# Altium PCB AIRZAI_LED_SENSE_FLEX_REVC.PcbDoc
Units mm, origin at the board's own origin, x right, y up, seen from the top; angles counter-clockwise.
Board outline 69.05 x 111.73 mm, 2 copper layers (Top Layer, Bottom Layer); 28 components, 19 nets, 88 pads, 45 vias.
Unrouted connection lines stored in the file: 72.
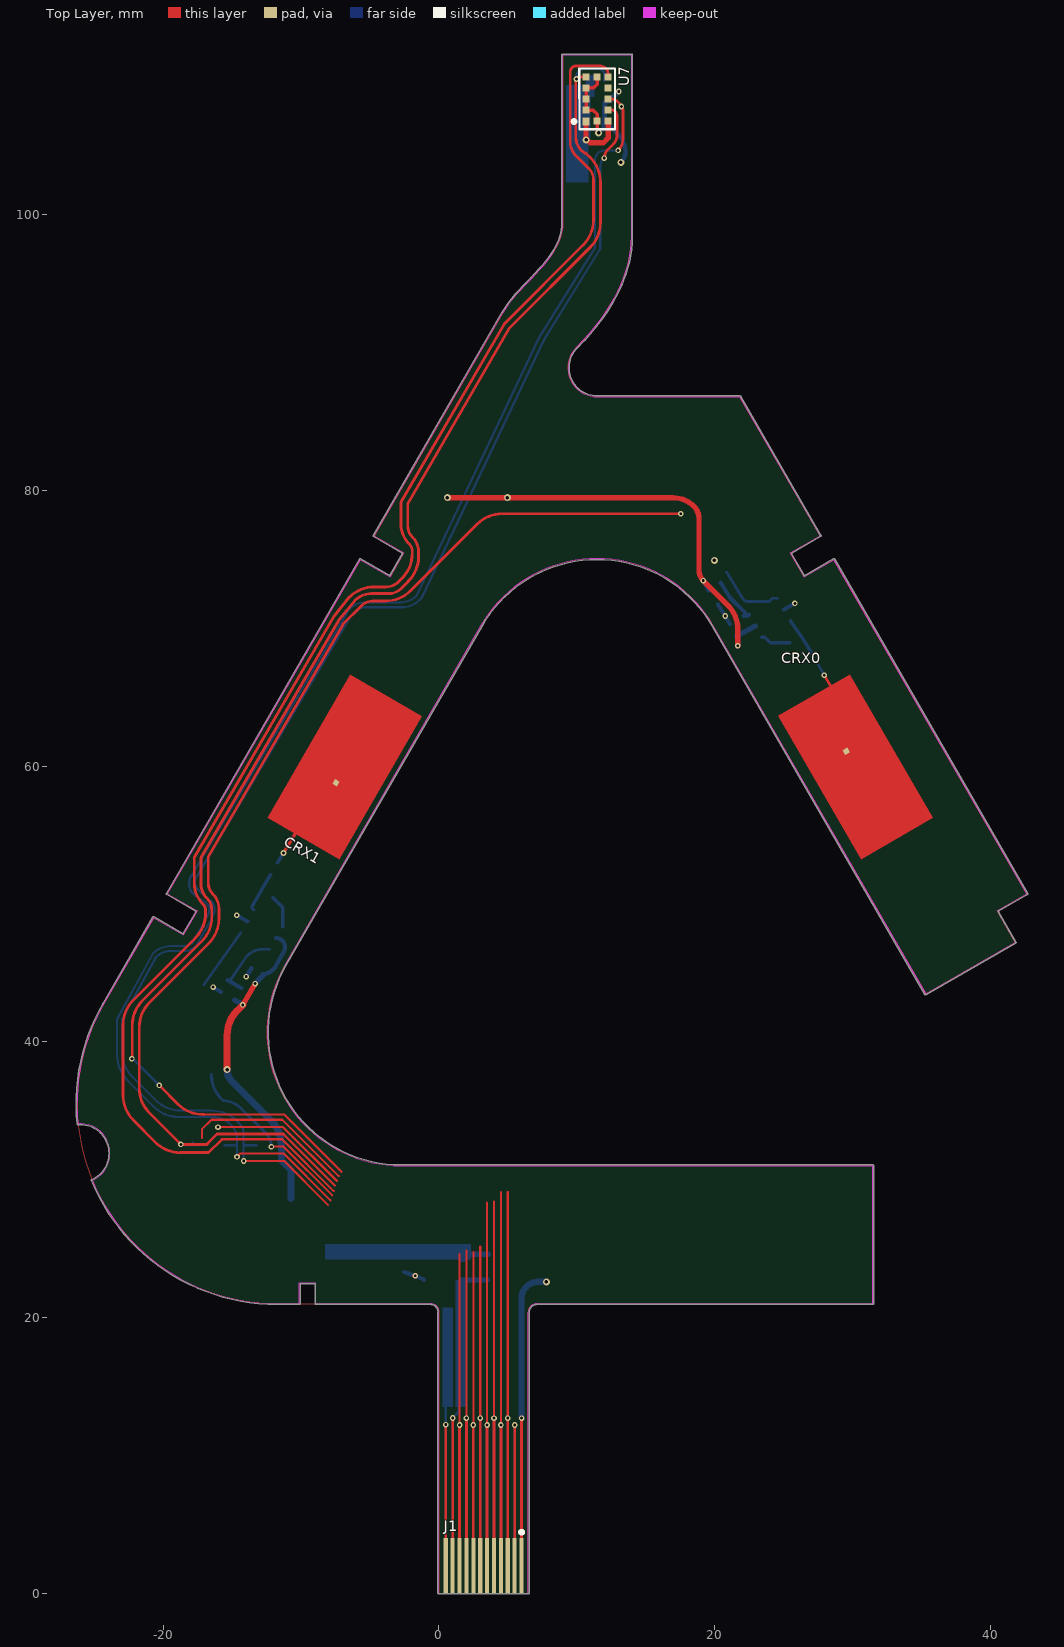
[diagram p0: Top Layer view]
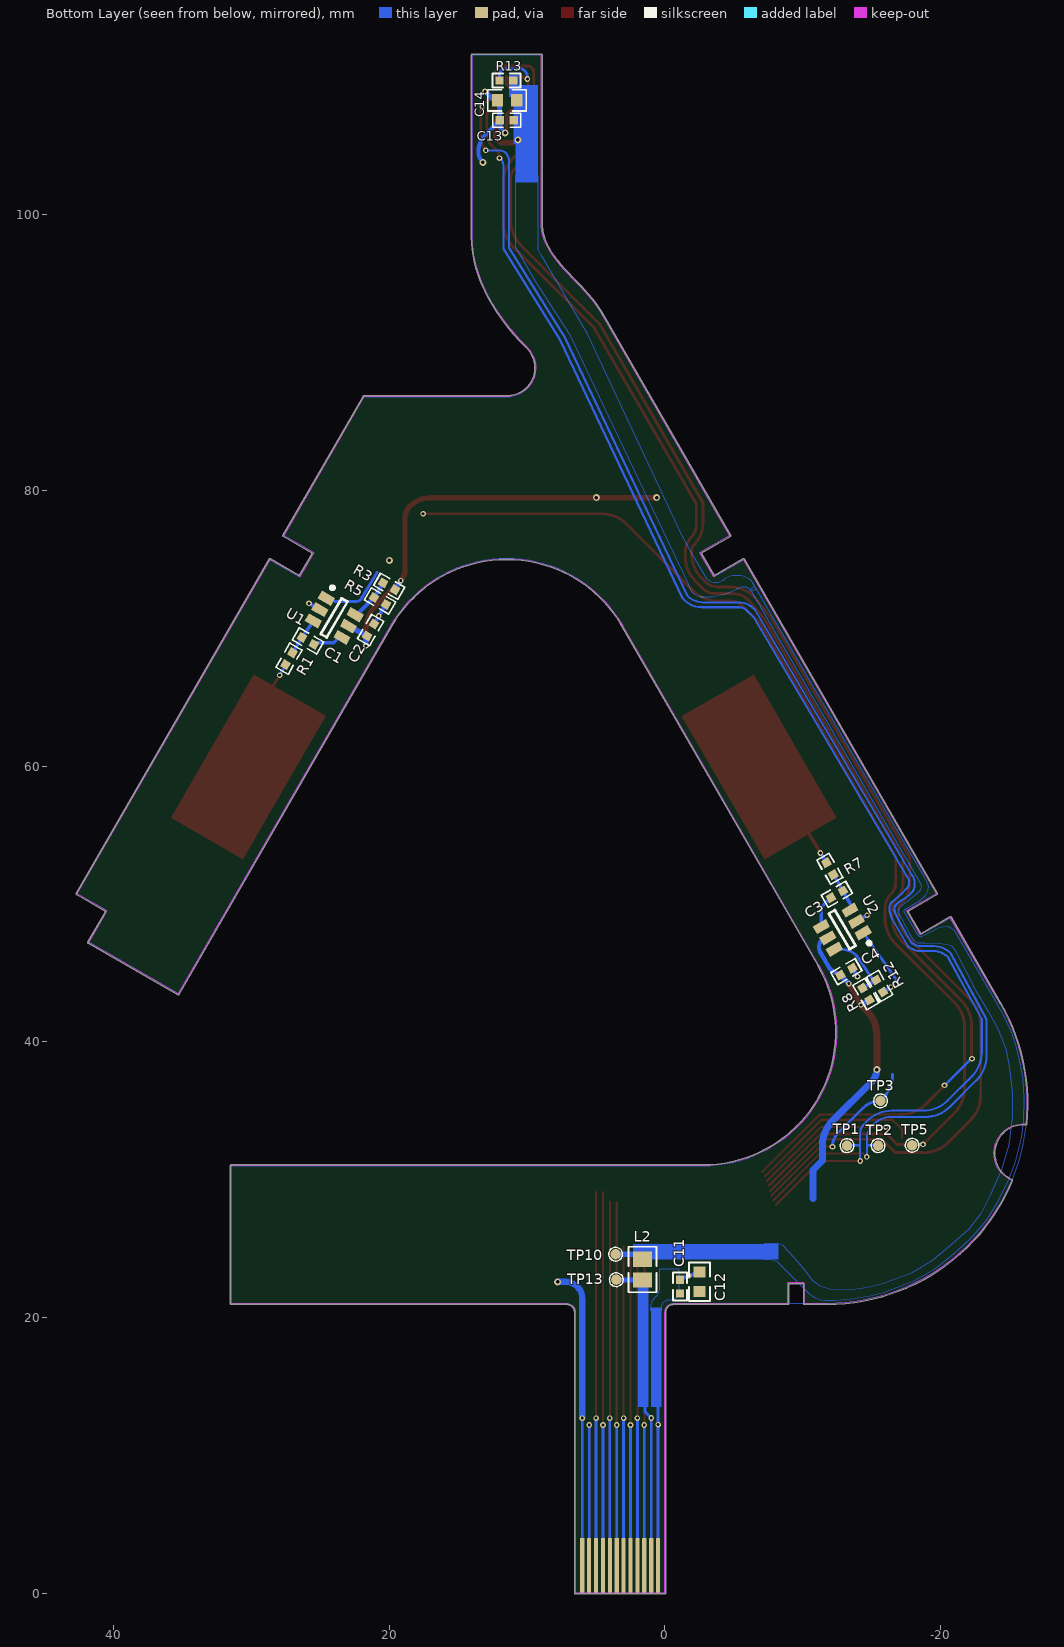
[diagram p1: Bottom Layer view, seen from below]
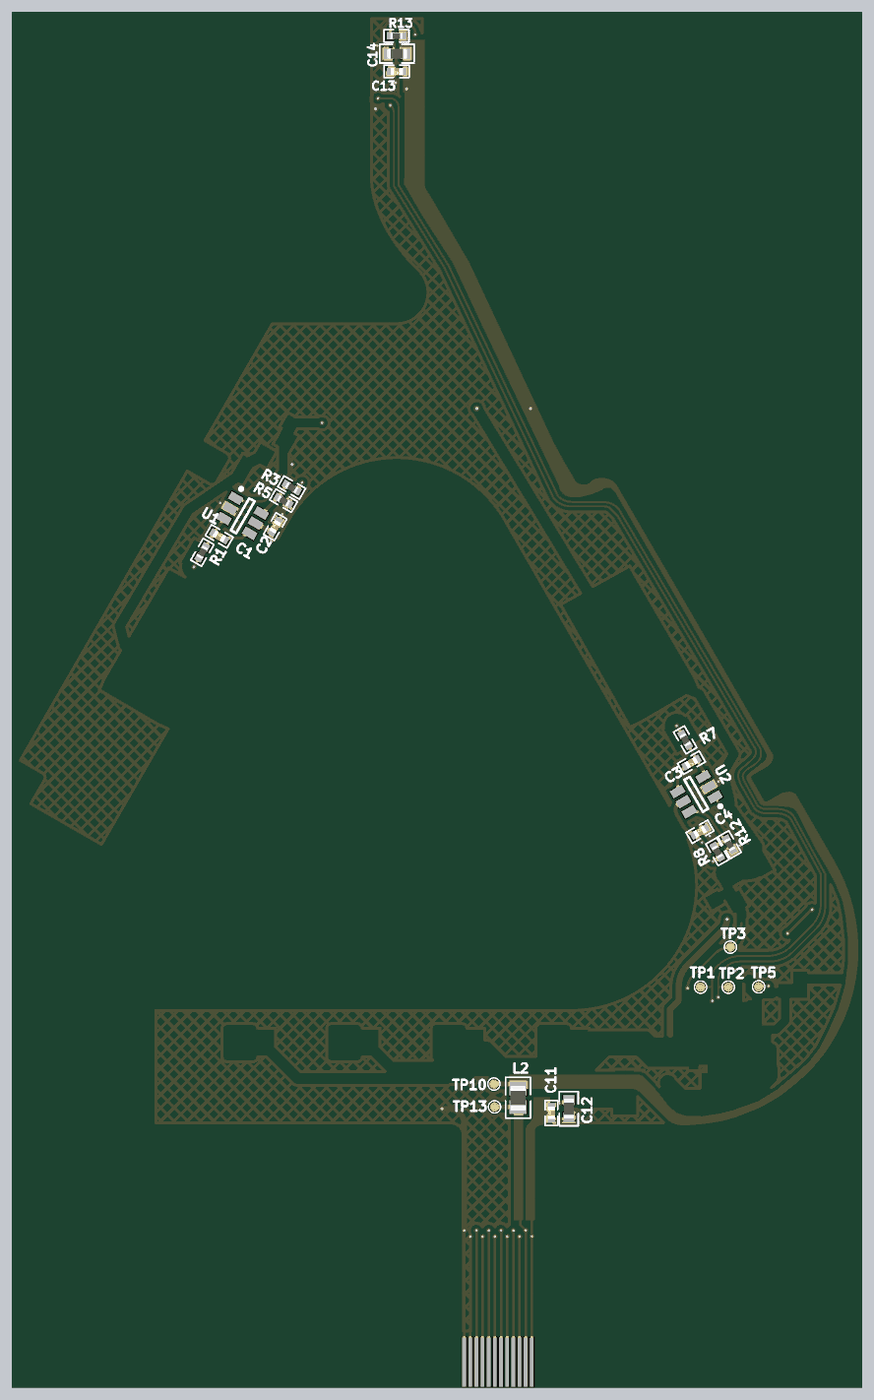
[diagram p2: 3D render of the assembled board from below, using the file's embedded part models]

## Layer stack, top to bottom
Top Solder: solder mask 0.0102, Solder Resist, Dk 3.5
Top Layer: signal copper 0.0356
Dielectric 1: dielectric 0.32, FR-4, Dk 4.8
Bottom Layer: signal copper 0.0356
Bottom Solder: solder mask 0.0102, Solder Resist, Dk 3.5

## Board outline
-25.209,29.911 cw(c-25.15,29.935) -25.175,29.994 ccw(c-26.021,31.901) -23.935,31.901 ccw(c-26.021,31.901) -26.182,33.981 cw(c-26.187,34.045) -26.251,34.038 cw(c-11.76,35.501) -24.373,42.783 cw(c-24.318,42.751) -24.373,42.783 -20.761,49.039 cw(c-20.705,49.007) -20.673,49.063 -18.564,47.845 -17.627,49.466 -19.737,50.684 cw(c-19.705,50.739) -19.761,50.771 -5.76,75.019 cw(c-5.705,74.987) -5.673,75.042 -3.563,73.824 -2.627,75.446 -4.737,76.664 cw(c-4.705,76.719) -4.76,76.751 4.583,92.932 cw(c4.638,92.9) 4.583,92.933 cw(c11.813,88.612) 5.542,94.235 cw(c21.327,80.392) 6.104,94.851 cw(c6.151,94.807) 6.104,94.851 6.683,95.457 cw(c6.729,95.413) 6.684,95.457 ccw(c-15.944,117.23) 7.251,96.063 cw(c7.298,96.019) 7.251,96.063 ccw(c-2.378,104.856) 7.777,96.676 cw(c7.827,96.637) 7.778,96.677 ccw(c1.874,101.437) 8.235,97.308 ccw(c1.874,101.437) 8.236,97.308 cw(c8.289,97.274) 8.236,97.309 ccw(c4.017,100.048) 8.596,97.967 ccw(c5.182,99.516) 8.596,97.967 ccw(c5.182,99.516) 8.832,98.66 ccw(c5.182,99.516) 8.832,98.661 8.832,98.66 ccw(c5.64,99.401) 8.917,99.4 8.917,100.4 cw(c8.981,100.4) 8.918,100.409 8.918,111.6 cw(c8.982,111.6) 8.986,111.664 13.982,111.664 cw(c13.982,111.6) 14.046,111.6 cw(c13.982,111.6) 14.045,111.591 14.045,100.4 ccw(c13.981,100.4) 14.045,100.4 14.045,98.4 cw(c13.981,98.4) 14.045,98.4 cw(c6.078,98.43) 13.834,96.61 13.834,96.611 cw(c4.66,98.734) 13.586,95.733 cw(c3.527,99.114) 13.254,94.873 cw(c2.33,99.635) 12.85,94.035 cw(c12.793,94.065) 12.85,94.035 cw(c0.617,100.57) 11.858,92.447 cw(c-1.264,101.928) 10.056,90.355 cw(c10.011,90.4) 10.055,90.354 cw(c11.481,88.9) 10.056,90.355 10.055,90.354 ccw(c11.481,88.9) 11.481,86.864 21.846,86.864 cw(c21.846,86.8) 21.901,86.832 27.721,76.75 cw(c27.666,76.718) 27.73,76.718 cw(c27.666,76.718) 27.698,76.663 cw(c27.666,76.718) 27.698,76.663 25.588,75.445 26.524,73.824 28.634,75.041 cw(c28.666,74.986) 28.634,75.042 28.634,75.041 28.634,75.042 cw(c28.666,74.986) 28.721,75.018 cw(c28.666,74.986) 28.721,75.018 42.72,50.77 cw(c42.665,50.738) 42.72,50.77 cw(c42.665,50.738) 42.729,50.738 cw(c42.665,50.738) 42.697,50.683 cw(c42.665,50.738) 42.697,50.683 40.587,49.465 41.87,47.241 cw(c41.815,47.209) 41.871,47.241 41.87,47.241 41.871,47.241 cw(c41.815,47.209) 41.879,47.209 cw(c41.815,47.209) 41.847,47.154 cw(c41.815,47.209) 41.847,47.154 35.347,43.413 cw(c35.315,43.468) 35.347,43.412 35.347,43.413 cw(c35.315,43.468) 35.26,43.436 cw(c35.315,43.468) 35.26,43.436 19.825,70.17 cw(c19.881,70.202) 19.825,70.171 cw(c19.881,70.202) 19.825,70.171 cw(c11.48,65.353) 19.825,70.171 19.825,70.17 19.825,70.171 ccw(c11.48,65.353) 3.135,70.171 ccw(c11.48,65.353) 3.135,70.171 ccw(c3.08,70.203) 3.135,70.171 -11.099,45.519 cw(c-11.154,45.551) -11.099,45.518 ccw(c-2.754,40.701) -2.754,31.064 31.479,31.064 cw(c31.479,31) 31.543,31 cw(c31.479,31) 31.543,31 31.543,21 ccw(c31.479,21) 31.543,21 cw(c31.479,21) 31.479,20.936 7.11,20.936 cw(c7.103,21) 7.104,20.936 ccw(c7.106,20.394) 6.564,20.391 cw(c6.5,20.39) 6.564,20.39 6.564,0 cw(c6.5,0) 6.5,-0.064 0,-0.064 cw(c0,0) -0.064,0 -0.064,20.381 cw(c0,20.381) -0.064,20.382 ccw(c-0.606,20.394) -0.064,20.394 ccw(c-0.606,20.394) -0.595,20.936 ccw(c-0.606,20.394) -0.595,20.936 -0.594,20.936 -8.92,20.936 cw(c-8.92,21) -8.966,20.955 cw(c-8.921,21.001) -8.985,21.001 -8.985,22.437 -10.057,22.437 -10.057,21.001 ccw(c-10.121,21.001) -10.057,21.001 cw(c-10.121,21.001) -10.121,20.937 -11.761,20.937 cw(c-11.76,35.501)

## Design rules (kind name [scope] priority, off if disabled: settings)
Clearance Clearance_Board_Cutout_Electrodes [(InComponent('CRX0') OR InComponent('CRX1')) vs OnLayer('Multi-Layer')] p1: gap=0 ignorepadtopadclearanceinfootprint=FALSE
Clearance Clearance_Board_Cutout_Diodes [(InComponent('D1') OR InComponent('D2') OR InComponent('D3') OR InComponent('D4') OR InComponent('D5') OR InComponent('D6')) vs OnLayer('Multi-Layer')] p2: gap=0 ignorepadtopadclearanceinfootprint=FALSE
Clearance Clearance_Keepout [(OnLayer('Keep-Out Layer')) vs (InComponent('D1') OR InComponent('D2') OR InComponent('D3') OR InComponent('D4') OR InComponent('D5') OR InComponent('D6') OR InComponent('CRX0') OR InComponent('CRX1') OR InComponent('J1'))] p3: gap=0 ignorepadtopadclearanceinfootprint=FALSE
Clearance Clearance_GND_POLY_ELECTRODE [(InComponent('CRX0') OR InComponent('CRX1') OR InComponent('CRX2') OR InNet('NetCRX0_1') OR InNet('NetCRX1_1') OR InNet('NetCRX2_1') OR InNet('NetR4_2') OR InNet('NetR2_1') OR InNet('NetR1_1')) vs (InNet('GND') AND InPolygon)] p4: gap=0.762 ignorepadtopadclearanceinfootprint=FALSE
Clearance Clearance_POLYGON_KEEPOUT [(OnLayer('Keep-Out Layer')) vs (InNet('GND') AND InPolygon)] p5: gap=0.254 ignorepadtopadclearanceinfootprint=FALSE
Clearance Clearance_GND_POLY_REST [All vs (InNet('GND') AND InPolygon)] p6: gap=0.254 ignorepadtopadclearanceinfootprint=FALSE
Clearance [All] p7: gap=0.152 ignorepadtopadclearanceinfootprint=FALSE
MinimumSolderMaskSliver [All] p1: minsoldermaskwidth=0.025
PolygonConnect [All] p1: connectstyle=Direct reliefconductorwidth=0.254 reliefentries=4 polygonreliefangle="90 Angle" airgapwidth=0.254
RoomDefinition AIRZAI_LED_SENSE_FLEX_REVC [InComponentClass('AIRZAI_LED_SENSE_FLEX_REVC')] p1: confinementstyle=ConfineIn formatcopy=TRUE lockcomponents=FALSE outline -98.86,-68.935 273.504,-68.935 273.504,174.905 -98.86,174.905
RoutingVias [All] p1: holewidth=0.711 width=1.27 viastyle="Through Hole" minholewidth=0.203 minwidth=0.406 maxholewidth=0.711 maxwidth=1.27
SilkToSilkClearance [All] p1: silktosilkclearance=0.025
SilkToSolderMaskClearance [IsPad] p1: minsilkscreentomaskgap=0.051 clearancetoexposedcopper=TRUE
SolderMaskExpansion [All] p1: expansion=0.102
UnRoutedNet [All] p1: checkbadconnections=TRUE
Width [All] p1: maxlimit=2.54 minlimit=0.152 preferedwidth=0.254
26 further rules are at their usual default settings.

## Components (designator, comment, footprint, x,y, rotation, side; value= is the part's Value field where it differs from the comment)
C1 "22nF" 0402CAP 25.908,69.088 r210 bottom
C2 "0.1µF" 0402CAP 21.361,69.875 r120 bottom
C3 "22nF" 0402CAP -12.471,50.698 r330 bottom
C4 "0.1µF" 0402CAP -13.161,45.087 r150 bottom
C11 "0.1µF" 0402CAP -1.086,22.238 r90 bottom
C12 "10µF" 0603 -2.508,22.588 r90 bottom
C13 "0.1µF" 0402CAP 11.481,106.864 r0 bottom
C14 "4.7µF" 0603 11.455,108.306 r180 bottom
CRX0 "CONTACT POINT 1" "CONTACT_POINT_1CM _SQ" 30.23,59.95 r300 top
CRX1 "CONTACT POINT 1" "CONTACT_POINT_1CM _SQ" -6.828,59.938 r60 top
J1 "FFC Pads" FFC_PADS 3.25,2 r0 top locked
L2 "CB2012T100KR" 0805 1.626,23.47 r90 bottom value=10uH
R1 "10k 0402(1005)" 0402 27.28,67.793 r300 bottom value=10k
R3 "Jumper 0402(1005)" 0402 20.018,73.05 r210 bottom value=0R
R5 "DNP 0402(1005)" 0402 20.676,71.984 r210 bottom value=DNP
R7 "10k 0402(1005)" 0402 -11.963,52.553 r60 bottom value=10k
R8 "Jumper 0402(1005)" 0402 -14.58,43.459 r240 bottom value=0R
R12 "DNP 0402(1005)" 0402 -15.57,44.044 r240 bottom value=DNP
R13 "10k 0402(1005)" 0402 11.506,109.753 r0 bottom value=10k
TP1 "Test Point" TP_0.9MM -13.21,32.461 r90 bottom
TP2 "Test Point" TP_0.9MM -15.467,32.461 r90 bottom
TP3 "Test Point" TP_0.9MM -15.638,35.712 r90 bottom
TP5 "Test Point" TP_0.9MM -17.932,32.487 r90 bottom
TP10 "Test Point" TP_0.9MM 3.581,24.587 r90 bottom
TP13 "Test Point" TP_0.9MM 3.531,22.733 r90 bottom
U1 "AT42QT1010-TSHR" SOT-23-6-AT42QT1010-TSHR 24.002,70.762 r210 bottom
U2 "AT42QT1010-TSHR" SOT-23-6-AT42QT1010-TSHR -12.86,48.133 r330 bottom
U7 "VL53L0CXV0DH/1" VL53L0X 11.481,108.407 r270 top

## Footprints (in the part's own frame and the unit in brackets; to place one, negate y for a bottom-side part, rotate by r counter-clockwise, add the part's x,y. Pads: shape width x height; smd on the part's side, far side on the other; paste and mask are expansions set on the pad)
0402 [mm] "Chip Resistor, Body 1.1x0.5mm, IPC High Density"
  rect 0.6x0.6 smd: 1(-0.5,0) 2(0.5,0)
  silkscreen extent -1.02,-0.51 1.02,0.51, body extent -0.5,-0.25 0.5,0.25, height 0.27
0402CAP [mm] "Chip Capacitor, Body 1.1x0.5mm, IPC High Density"
  rect 0.6x0.6 smd: 1(-0.5,0) 2(0.5,0)
  silkscreen extent -1.02,-0.51 1.02,0.51, body extent -0.5,-0.3 0.5,0.3, height 0.19
0603 [mm] "Chip Resistor, Body 1.6x0.8mm, IPC High Density"
  rect 0.8x0.9 smd: 1(-0.7,0) 2(0.7,0)
  silkscreen extent -1.4,-0.76 1.4,0.76, body extent -0.8,-0.41 0.8,0.4, height 0.37
0805 [mm] "Chip Resistor, Body 2.0x1.3mm, IPC High Density"
  rect 1.1x1.4 smd: 1(-0.75,0) 2(0.75,0)
  silkscreen extent -1.65,-1.02 1.65,1.02, body extent -1.02,-0.64 0.98,0.62, height 0.47
"CONTACT_POINT_1CM _SQ" [mm]
  rect 0.4x0.4 smd paste-2 mask-2: 1(-1.312,-0.018)
  Top Layer region: 6,-3 6,3 -6,3 -6,-3
FFC_PADS [mm] "(0.50mm"
  rect 0.3x4 smd: 1(2.75,0) 2(2.25,0) 3(1.75,0) 4(1.25,0) 5(0.75,0) 6(0.25,0) 7(-0.25,0) 8(-0.75,0) 9(-1.25,0) 10(-1.75,0) 11(-2.25,0) 12(-2.75,0)
  rect 0.3x4 smd far side: 1(2.75,0) 2(2.25,0) 3(1.75,0) 4(1.25,0) 5(0.75,0) 6(0.25,0) 7(-0.25,0) 8(-0.75,0) 9(-1.25,0) 10(-1.75,0) 11(-2.25,0) 12(-2.75,0)
  silkscreen extent 2.63,2.29 2.87,2.54
SOT-23-6-AT42QT1010-TSHR [mm] "SOT23, 6-Leads, Body 2.9x1.6mm, Pitch 0.95mm, Lead Span 2.8mm, IPC Medium Density"
  rect 1.1x0.65 smd: 1(-1.2,0.95) 2(-1.2,0) 3(-1.2,-0.95) 4(1.2,-0.95) 5(1.2,0) 6(1.2,0.95)
  silkscreen extent -1.32,-1.5 0.25,1.95, body extent -0.88,-1.5 0.88,1.5, height 1.45
TP_0.9MM [mm] "0.9MM DIA TESTPOINT"
  round 0.75 smd paste-5 mask+0.05: 1(0,0)
  silkscreen extent -0.5,-0.5 0.5,0.5
VL53L0X [mm]
  rect 0.58x0.5 smd: 1(1.64,-0.8)
  rect 0.5x0.5 smd: 2(0.8,-0.8) 3(0,-0.8) 4(-0.8,-0.8) 5(-1.6,-0.8) 6(-1.6,0) 7(-1.6,0.8) 8(-0.8,0.8) 9(0,0.8) 10(0.8,0.8) 11(1.6,0.8) 12(1.6,0)
  silkscreen extent -2.2,-1.79 2.2,1.3, body extent -2.2,-1.3 2.2,1.3, height 3.72

## Part data
C1 C3: library part C0402-100n, "Capacitor, X7R, ±10%", Case/Package=0402, Case Code (Metric)=1005, Dielectric=X7R, Manufacturer=TDK, Manufacturer Part Number=CGA2B2X7R1E223K050BA, Max Operating Temperature=125°C, Min Operating Temperature=-55°C, Package Quantity=1, Ratings=AEC-Q200, Supplier Part Number 1=445-5609-1-ND, Tolerance=10%, Voltage Rating=25V, Capacitance=22nF, Case Code (Imperial)=0402, ComponentLink1Description=http://www.mouser.com/ds/2/281/c02e-2905.pdf?src-supplier=Mouser, ComponentLink1URL=http://www.mouser.com/ds/2/281/c02e-2905.pdf?src-supplier=Mouser, ComponentLink2Description=http://psearch.en.murata.com/capacitor/product/GRM155R71H333KE14%23.pdf?src-supplier=Avnet, ComponentLink2URL=http://psearch.en.murata.com/capacitor/product/GRM155R71H333KE14%23.pdf?src-supplier=Avnet, ComponentLink3Description=http://search.murata.co.jp/Ceramy/image/img/A01X/G101/ENG/GRM155R71H333KE14-01.pdf?src-supplier=Digi-Key, ComponentLink3URL=http://search.murata.co.jp/Ceramy/image/img/A01X/G101/ENG/GRM155R71H333KE14-01.pdf?src-supplier=Digi-Key, ComponentLink4Description=https://datasheet.ciiva.com/24220/cga2b2x7r1e223k050ba-265693-24220032.pdf?src-supplier=Mouser, ComponentLink4URL=https://datasheet.ciiva.com/24220/cga2b2x7r1e223k050ba-265693-24220032.pdf?src-supplier=Mouser, ComponentLink5Description=https://datasheet.ciiva.com/7975/1807242-7975269.pdf?src-supplier=Element14, ComponentLink5URL=https://datasheet.ciiva.com/7975/1807242-7975269.pdf?src-supplier=Element14, Composition=Ceramic, Depth=0.5mm, Height=0.5mm, Length=1mm, Mount="Surface Mount", Packaging="Tape and Reel", Pricing 1="1 = 0.10000, 10 = 0.06500, 100 = 0.02910, 500 = 0.02080, 1000 = 0.01635, 2500 = 0.01486, 5000 = 0.01367 (USD)", REACH SVHC="No SVHC", RoHS=Yes, Stock 1=499669, Supplier 1=Digi-Key, Termination=SMD/SMT, Thickness=0.022inch, Voltage Rating (DC)=25V, Weight=2.3E-05oz, Width=0.5mm
C2 C4 C11 C13: library part C0402-100n, "Capacitor, X7R, ±10%", Case-EIA=0402, Case-Metric=1005, Manufacturer=TDK, Manufacturer Part Number=C1005X7R1C104K, Rated Voltage="16 V", Supplier Part Number 1=445-4952-2-ND, Tolerance=±20%, Max Thickness="0.6 mm", Note="16V ±10% X7R", Pin Count=2, Supplier 1=Digi-Key, Technology=SMT
C12: library part C0402-100n, "Capacitor, X7R, ±10%", Case-EIA=0603, Case-Metric=1608, Manufacturer=MURATA, Manufacturer Part Number=GRM188R60J106ME47D, Rated Voltage="6.3 V", Supplier Part Number 1=490-3896-6-ND, Tolerance=±20%, Max Thickness="0.9 mm", Note="6.3volts X5R 20%", Pin Count=2, Supplier 1=Digi-Key, Technology=SMT
C14: library part "C0603-1µ0 X7R", "Capacitor, X7R, ±10%", Case-EIA=0402, Case-Metric=1005, Manufacturer=TDK, Manufacturer Part Number=C1005X5R0J475M, Rated Voltage="6.3 V", Supplier Part Number 1=445-7395-2-ND, Tolerance=±20%, Max Thickness="0.6 mm", Note="6.3volts X5R 20%", Supplier 1=Digi-Key, Technology=SMT
CRX0 CRX1: library part WIRE_POINT
J1: library part FFC_PADS, "0.5 mm Pitch FFC Pads", ComponentLink1URL=http://www.molex.com/molex/index.jsp, ComponentLink2Description=Datasheet, ComponentLink2URL=http://www.molex.com/webdocs/datasheets/pdf/en-us/0528921233_FFC_FPC_CONNECTORS.pdf, ComponentLink3Description="Package Specification", ComponentLink3URL=http://www.molex.com/pdm_docs/sd/528921233_sd.pdf, Note=DNP
L2: "Inductor, 10 µH, 0.5A, 0.65 ohm, SMD", Case/Package=0805, Case Code (Metric)=2012, Current Rating=520mA, DC Resistance (DCR)=500mR, Inductance=10uH, Inductance Tolerance=10%, Manufacturer="Taiyo Yuden", Max DC Current=200mA, Max Operating Temperature=105°C, Min Operating Temperature=-40°C, Package Quantity=3000, Self Resonant Frequency=32MHz, Supplier Part Number 1=587-2452-1-ND, Test Frequency=2.52MHz, Value1="0.65 ohm", Value2=0.5A, ValueDisplayed=10µH, Case Code (Imperial)=0805, ComponentLink1Description="Datasheet link", ComponentLink1URL=http://www.yuden.co.jp/ut/product/category/inductor/BRC2012T2R2MD.pdf, ComponentLink2Description=https://datasheet.ciiva.com/1040/cb2012t100kr-ss-1040384.pdf?src-supplier=Digi-Key, ComponentLink2URL=https://datasheet.ciiva.com/1040/cb2012t100kr-ss-1040384.pdf?src-supplier=Digi-Key, Composition=Wirewound, Core Material=Ferrite, Halogen Free="Halogen Free", Height=1.25mm, Height - Seated (Max)=0.057inch, Lead Free="Lead Free", Length=0.079inch, Manufacturer Part Number=CB2012T100KR, Mount="Surface Mount", Number of Pins=2, Packaging="Tape and Reel", PartNumber=CB2012T100KR, Pricing 1="1 = 0.23000, 10 = 0.20700, 100 = 0.14230, 500 = 0.12162, 1000 = 0.09315 (USD)", REACH SVHC=Unknown, RoHS=Yes, Saturation Current=200mA, Shielding=Unshielded, Stock 1=18059, Supplier 1=Digi-Key, Technology=Wirewound, Termination=SMD/SMT, Tolerance=10%, Width=0.049inch
R1 R7 R13: library part RES, "10k 0.063W 1% 0402 (1005 Metric)  SMD", Case-EIA=0402, Case-Metric=1005, Manufacturer=Yageo, Manufacturer Part Number=RC0402FR-0710KL, Power=0.063W, Supplier Part Number 1=311-10.0KLRCT-ND, Tolerance=None, Max Thickness="0.6 mm", Note="RES SMD 10K OHM 1% 1/16W 0402", Pin Count=2, Supplier 1=Digi-Key, Technology=SMT
R3 R8: library part RES, "Jumper 0402 (1005 Metric)", Case-EIA=0402, Case-Metric=1005, Manufacturer=Panasonic, Manufacturer Part Number=ERJ-2GE0R00X, Power=None, Supplier Part Number 1=P0.0JCT-ND, Max Thickness="0.6 mm", Note="0.1W JUMPER", Pin Count=2, Supplier 1=Digi-Key, Technology=SMT, Tolerance=None
R5 R12: library part RES, "DNP", Case-EIA=0402, Case-Metric=1005, Power="0.0625 W", Tolerance=None, Manufacturer Part Number=DNP, Max Thickness="0.6 mm", Note=DNP, Pin Count=2, Supplier 1=Digi-Key, Supplier Part Number 1=DNP, Technology=SMT
U1 U2: "One-channel Touch Sensor IC with Reset Timer, -40° to +85° C, 6-pin SOT23", Supplier Part Number 1=AT42QT1010-TSHRCT-ND, Code_IPC=SOT26A-6, Code_JEDEC=MO-178-AB, ComponentLink1Description="Manufacturer URL", ComponentLink1URL=http://www.atmel.com/, ComponentLink2Description=Datasheet, ComponentLink2URL=http://www.atmel.com/Images/doc9541.pdf, DatasheetVersion="revH, May-2010", PackageDescription="6-Lead, 2.90 x 1.60 mm Plastic Small Outline Package (SOT23)", PackageReference=6ST1, PackageVersion="revA, Jun-2008", PartNumber=AT42QT1010-TSHR
U7: library part VL53L0X, Case-EIA=LGA12, Manufacturer=ST, Supplier Part Number 1=497-16538-1-ND, Tolerance=None, Manufacturer Part Number=VL53L0CXV0DH/1, Note="SENSOR LASER DISTANCE TOF 2M", Supplier 1=Digi-Key, Technology=SMT

## Via types
v1: diameter 0.406, hole 0.203, Top Layer to Bottom Layer, tented both sides, 37 vias
v2: diameter 0.508, hole 0.254, Top Layer to Bottom Layer, tented both sides, 8 vias

## Nets (pads, with @x,y where several pads share a name; then routed paths per layer and width w, separated by ;. In a path a pad name is that pad's centre, name@x,y a point inside that pad or via, vN(x,y) a via of type N, cw(c..) or ccw(c..) an arc to the next point about the centre after c; other vN are vias at no path point)
3V3: C2.1 C4.1 C11.1 C12.1 C13.1 C14.2 L2.2 R3.2 R8.2 R13.1 TP10.1 U1.5 U2.5 U7.1 U7.11 | length 62.1
  Top Layer w0.381: v1(-14.224,42.672) v1(-13.336,44.221) ; v2(0.61,79.477) 16.984,79.477 cw(c16.984,77.309) 18.517,78.842 cw(c17.658,77.983) 18.872,77.983 18.872,74.199 ccw(c19.913,74.199) v1(19.177,73.463) 20.948,71.693 cw(c19.152,69.897) 21.692,69.897 v1(21.692,68.732) ; U7.1 v2(10.681,105.444) 10.761,105.444 10.973,105.232 11.938,105.232 12.281,105.575 U7.11@12.281,106.727
  Top Layer w0.508: v2(-15.367,37.973) -15.367,40.477 cw(c-12.827,40.477) -14.623,42.273 v1(-14.224,42.672)
  Bottom Layer w0.305: C4.1@-12.804,44.913 ccw(c-12.804,45.977) -12.052,45.225 -11.913,45.364 -11.252,46.519 -11.176,46.787 -11.176,46.888 ccw(c-11.821,46.888) U2.5
  Bottom Layer w0.381: R8.2 v1(-14.224,42.672) ; v1(-13.336,44.221) -13.336,44.238 -12.734,44.84 C4.1@-12.725,44.856 ; L2.2 1.776,24.22 2.143,24.587 TP10.1 ; v1(19.177,73.463) R3.2 ; v1(21.692,68.732) 21.692,69.362 C2.1 U1.5
  Bottom Layer w0.508: v2(-15.367,37.973) ccw(c-14.141,37.973) -15.008,37.106 -12.174,34.272 cw(c-13.97,32.476) -11.43,32.476 -11.43,31.389 -10.736,30.695 -10.736,28.608
  other v2: 4.971,79.481
CAP1_TOUCH_OUT: J1.6 TP5.1 U1.1 | length 127.1
  Top Layer w0.152: -11.278,33.299 -7.544,29.566 ; v1(3.5,12.192) 3.5,23.528 ; 3.5,28.34 3.5,23.528 ; 3.505,23.533 3.5,23.528
  Top Layer w0.203: -11.278,33.299 -16.104,33.299 -16.561,32.842 -16.561,32.831 -16.839,32.553 v1(-18.72,32.553) -20.998,34.831 cw(c-19.202,36.627) -21.742,36.627 -21.742,41.05 cw(c-19.202,41.05) -20.998,42.846 -16.707,47.138 ccw(c-18.503,48.934) -15.963,48.934 -15.963,49.648 ccw(c-17.485,49.648) -16.408,50.724 cw(c-15.611,51.521) -16.739,51.521 -16.739,53.416 -6.948,70.305 -5.6,71.652 cw(c-4.801,70.852) -4.801,71.984 -3.847,71.984 ccw(c-3.847,74.524) -2.051,72.728 2.785,77.564 cw(c4.581,75.768) 4.581,78.308 v1(17.551,78.308) ; J1.6@3.5,2 v1(3.5,12.192)
  Bottom Layer w0.203: v1(-18.72,32.553) -17.962,32.553 -17.864,32.651 cw(c-18.097,32.651) TP5.1 ; J1.6@3.5,2 v1(3.5,12.192) ; 20.879,74.065 22.073,72.087 ccw(c22.438,72.453) 22.438,71.936 23.969,71.936 24.218,72.184 U1.1
CAP2_TOUCH_OUT: J1.8 TP3.1 U2.1 | length 50.7
  Top Layer w0.152: v1(-12.154,32.385) -11.277,32.385 -7.746,28.854 ; v1(2.5,12.192) 2.5,23.607 ; 2.5,24.755 2.5,23.607 ; 2.515,23.622 2.5,23.607
  Top Layer w0.203: J1.8@2.5,2 v1(2.5,12.192)
  Bottom Layer w0.203: -17.043,44.142 -17.047,44.145 U2.1 ; -16.518,37.644 ccw(c-13.978,37.644) -15.774,35.848 TP3.1 cw(c-15.638,33.934) -14.381,35.192 -12.563,33.373 cw(c-13.552,32.385) v1(-12.154,32.385) ; J1.8@2.5,2 v1(2.5,12.192)
EN: J1.4 | length 49.8
  Top Layer w0.152: -17.196,33.02 -17.196,33.644 -16.499,34.341 -11.356,34.341 -7.267,30.251 ; 4.496,29.094 4.496,22.111 4.5,22.107 v1(4.5,12.192)
  Top Layer w0.203: J1.4@4.5,2 v1(4.5,12.192)
  Bottom Layer w0.203: J1.4@4.5,2 v1(4.5,12.192)
GND: C2.2 C4.2 C11.2 C12.2 C13.2 C14.1 J1.1 J1.2 R5.2 R12.2 U1.2 U2.2 U7.2 U7.3 U7.4 U7.6 U7.12 | length 71.9
  Top Layer w0.203: J1.2@5.5,2 v1(5.5,12.192) ; J1.1@6,2 v1(6,12.693)
  Top Layer w0.254: U7.6 11.481,109.474 11.214,109.207 U7.4 U7.3 U7.2 11.163,107.607 11.481,107.289 U7.12 11.481,106.058 v2(11.595,105.943)
  Top Layer w0.381: v1@-1.721,23.013 v1(-1.721,23.02)
  Bottom Layer w0.203: J1.2@5.5,2 v1(5.5,12.192) ; J1.1@6,2 v1(6,12.693)
  Bottom Layer w0.305: v1(-16.383,43.967) R12.2 ; v1(-14.663,49.174) U2.2 ; v1(-13.97,44.729) C4.2 ; C12.2 -2.24,23.196 v1(-1.721,23.02) C11.2 ; v2(11.595,105.943) 11.937,106.285 11.937,106.82 C13.2 13.018,105.826 cw(c11.764,104.572) 13.538,104.572 cw(c12.496,104.572) 13.233,103.835 v2(13.208,103.81) ; R5.2 v1(20.773,70.891) C2.2 ; U1.2 v1(25.832,71.809)
  Bottom Layer w0.381: C13.2 ccw(c11.901,106.944) 12.014,106.944 12.014,108.077 12.094,108.156 ccw(c11.944,108.306) C14.1 ; C14.1@12.37,108.28 13.043,108.953 v1(13.056,108.953)
  Bottom Layer w0.457: v1(6,12.693) 6,21.38 cw(c7.195,21.38) 6.35,22.225 cw(c7.208,21.367) 7.208,22.581 v2(7.798,22.581)
  other v2: 19.99,74.93
INT: J1.5 | length 47.3
  Top Layer w0.152: v1(-16.027,33.807) -11.307,33.807 -7.396,29.896 ; v1(4,12.693) 4,28.393
  Top Layer w0.203: J1.5@4,2 v1(4,12.693)
  Bottom Layer w0.203: J1.5@4,2 v1(4,12.693)
NetC1_1: C1.1 R1.1 U1.3 | length 2.8
  Bottom Layer w0.254: U1.3 C1.1 R1.1
NetC1_2: C1.2 U1.4 | length 2.2
  Bottom Layer w0.254: U1.4 23.658,69.339 24.034,68.962 C1.2@25.451,68.962
NetC3_1: C3.1 R7.1 U2.3 | length 3
  Bottom Layer w0.203: U2.3@-13.589,49.75 U2.3
  Bottom Layer w0.254: U2.3@-13.589,49.75 C3.1 R7.1
NetC3_2: C3.2 U2.4 | length 2.4
  Bottom Layer w0.254: C3.2 -11.346,49.756 U2.4
NetCRX0_1: CRX0.1 R1.2 | length 6.8
  Top Layer w0.203: v1(27.965,66.599) 29.824,63.533 29.257,61.22
  Bottom Layer w0.203: R1.2 v1(27.965,66.599)
NetCRX1_1: CRX1.1 R7.2 | length 7.2
  Top Layer w0.254: v1(-11.278,53.696) -8.014,59.108
  Bottom Layer w0.254: R7.2 v1(-11.278,53.696)
NetJ1_11: J1.11 L2.1 TP13.1 | length 25.3
  Top Layer w0.203: J1.11@1,2 v1(1,12.7)
  Bottom Layer w0.203: J1.11@1,2 v1(1,12.7) 1,12.709 1.448,13.157 1.448,14.503 1.422,14.478
  Bottom Layer w0.381: L2.1 TP13.1
NetR3_1: R3.1 R5.1 U1.6 | length 3.5
  Bottom Layer w0.305: R3.1 R5.1 22.208,71.135 22.208,70.983 22.116,70.891 22.263,70.891 ccw(c22.263,71.209) U1.6
NetR8_1: R8.1 R12.1 U2.6 | length 5.2
  Bottom Layer w0.203: R12.1@-15.318,44.475 -15.09,44.518 -13.919,46.237 cw(c-12.776,45.093) -12.776,46.71 U2.6
  Bottom Layer w0.305: R12.1@-15.318,44.475 R8.1
SCL: J1.10 TP1.1 U7.10 | length 138.6
  Top Layer w0.152: v1(-14.163,31.344) -11.227,31.344 -8.052,28.169 ; v1(1.5,12.192) 1.5,24.597
  Top Layer w0.203: J1.10@1.5,2 v1(1.5,12.192) ; v1(12.006,104.115) cw(c12.907,104.115) 12.27,104.751 12.659,105.141 ccw(c12.009,105.791) 12.929,105.791 12.929,107.15 ccw(c12.408,107.15) 12.776,107.518 ccw(c12.561,107.303) 12.561,107.607 U7.10
  Bottom Layer w0.152: v1(-14.163,31.344) -14.163,32.487 ; TP1.1 ccw(c-13.272,32.4) -13.272,32.487 -14.163,32.487 ; v1(12.006,104.115) 12.006,104.183 ccw(c12.723,103.466) 11.709,103.466 11.709,97.532 7.616,90.939 -1.27,72.187 -1.422,72.034 cw(c-2.649,73.261) -2.649,71.526 -5.385,71.526 ccw(c-5.385,70.732) -5.947,71.294 -6.443,70.798 -17.54,52.019 ccw(c-17.145,51.624) -17.704,51.624 -17.704,51.537 ccw(c-17.071,51.537) -17.518,51.089 -17.174,50.745 -16.474,50.165 cw(c-16.938,49.701) -16.281,49.701 -16.281,49.452 -16.488,48.902 -17.615,46.952 cw(c-18.504,47.841) -18.504,46.584 -19.459,46.584 ccw(c-19.459,45.054) -20.54,46.136 -22.987,41.656 -22.987,39.254 ccw(c-20.447,39.254) -22.243,37.458 -20.531,35.745 ccw(c-18.734,37.541) -18.734,35.001 -16.47,35.001 cw(c-16.47,32.461) -14.674,34.257 -14.427,34.011 cw(c-15.066,33.372) -14.163,33.372 -14.163,32.487
  Bottom Layer w0.203: J1.10@1.5,2 v1(1.5,12.192)
SDA: J1.9 TP2.1 U7.9 | length 141.9
  Top Layer w0.152: v1(-14.645,31.648) -14.391,31.902 -11.278,31.902 -7.874,28.499 ; v1(2,12.693) 2,24.834
  Top Layer w0.203: J1.9@2,2 v1(2,12.693) ; U7.9 12.471,108.407 cw(c12.471,107.67) 12.992,108.191 cw(c11.827,107.026) v1(13.246,107.864) cw(c12.968,107.587) 13.36,107.587 13.36,105.532 cw(c12.146,105.532) v1(13.005,104.673)
  Bottom Layer w0.152: TP2.1@-15.585,32.461 cw(c-15.524,32.4) -15.524,32.487 -14.645,32.487 ; v1@-14.663,31.529 v1@-14.645,31.546 ; v1(-14.645,31.648) -14.645,32.487 ; v1(13.005,104.673) 11.986,104.673 ccw(c11.986,104.066) 11.557,104.496 ccw(c12.109,103.944) 11.328,103.944 11.328,97.612 7.264,91.084 -1.626,72.352 cw(c-2.759,73.485) -2.759,71.882 -5.277,71.882 ccw(c-5.277,70.127) -6.518,71.368 -17.907,52.095 ccw(c-17.416,51.605) -18.11,51.605 -18.11,51.359 ccw(c-17.307,51.359) -17.875,50.791 -17.683,50.599 -16.967,50.14 -16.799,49.971 cw(c-17.189,49.581) -16.637,49.581 -16.723,49.281 -16.84,49.047 -17.831,47.233 cw(c-18.541,47.944) -18.541,46.939 -19.5,46.939 ccw(c-19.5,45.205) -20.726,46.431 -23.343,41.641 -23.343,39.001 ccw(c-20.803,39.001) -22.599,37.205 -20.681,35.288 ccw(c-18.885,37.084) -18.885,34.544 -16.408,34.544 cw(c-16.408,32.756) -15.144,34.02 -15.033,33.909 cw(c-15.969,32.973) -14.645,32.973 -14.645,32.487
  Bottom Layer w0.203: J1.9@2,2 v1(2,12.693) v1@2.007,12.7
TOFINT: J1.7 U7.7 | length 145
  Top Layer w0.152: -11.379,32.918 -7.62,29.159 ; 2.997,23.724 3,23.721 ; v1(3,12.693) 3,23.721 ; 3,25.136 3,23.721
  Top Layer w0.203: -11.379,32.918 -15.748,32.918 -16.713,31.953 -18.76,31.953 cw(c-18.76,34.493) -20.556,32.697 -22.167,34.308 cw(c-20.371,36.104) -22.911,36.104 -22.911,41.238 cw(c-20.371,41.238) -22.167,43.034 -17.672,47.529 ccw(c-19.468,49.325) -16.928,49.325 -16.928,49.51 ccw(c-17.621,49.51) -17.131,50 cw(c-15.626,51.505) -17.754,51.505 -17.754,53.365 -7.59,70.899 -6.493,72.26 cw(c-4.697,70.464) -4.697,73.004 -3.83,73.004 ccw(c-3.83,74.29) -2.921,73.381 -2.674,73.627 ccw(c-4.47,75.423) -1.93,75.423 -1.93,75.608 ccw(c-2.624,75.608) -2.134,76.098 cw(c-0.629,77.603) -2.757,77.603 -2.757,79.133 4.775,92.126 10.47,97.821 ccw(c8.674,99.617) 11.214,99.617 11.214,102.565 ccw(c10.106,102.565) 10.889,103.349 10.239,103.999 9.951,104.287 cw(c10.981,105.316) 9.525,105.316 9.525,110.325 cw(c10.045,110.325) 9.677,110.693 cw(c9.953,110.417) 9.953,110.807 11.645,110.807 cw(c11.645,110.124) 12.128,110.607 cw(c11.76,110.239) 12.281,110.239 U7.7 ; J1.7@3,2 v1(3,12.693)
  Bottom Layer w0.203: J1.7@3,2 v1(3,12.693)
XSHUNT: J1.3 R13.2 U7.5 | length 145.4
  Top Layer w0.152: -17.032,34.722 -11.227,34.722 -7.061,30.556 ; 4.978,22.504 5,22.483 ; v1(5,12.693) 5,22.483 ; 5,29.112 5,22.483
  Top Layer w0.203: v1@-22.243,38.76 -22.243,41.195 cw(c-19.703,41.195) -21.499,42.991 -17.218,47.273 ccw(c-19.014,49.069) -16.474,49.069 -16.474,49.57 ccw(c-17.638,49.57) -16.815,50.394 cw(c-15.72,51.488) -17.268,51.488 -17.268,53.338 -7.238,70.64 -6.071,72.034 cw(c-4.905,70.869) -4.905,72.517 -3.615,72.517 ccw(c-3.615,73.731) -2.757,72.873 -2.217,73.412 ccw(c-4.013,75.208) -1.473,75.208 -1.473,75.528 ccw(c-3.034,75.528) -1.93,76.632 cw(c-1.123,77.439) -2.265,77.439 -2.265,79.047 5.118,91.783 10.983,97.648 ccw(c9.187,99.444) 11.727,99.444 11.727,102.359 ccw(c9.187,102.359) 10.983,104.155 10.725,104.414 ; v1(-20.283,36.83) -18.919,35.466 ccw(c-17.123,37.262) -17.123,34.722 -17.032,34.722 ; J1.3@5,2 v1(5,12.693) ; U7.5 10.266,110.007 ccw(c10.266,109.75) 10.085,109.932 9.982,109.83 ccw(c10.105,109.707) 9.931,109.707 9.931,105.636 ccw(c11.275,105.636) 10.325,104.686 ccw(c11.245,105.606) 10.725,104.414 ; 10.719,104.419 10.725,104.414
  Bottom Layer w0.203: v1(-22.276,38.76) cw(c-22.276,38.61) v1@-22.17,38.716 ; v1@-22.169,38.716 v1(-20.283,36.83) ; J1.3@5,2 v1(5,12.693) ; v1(9.982,109.855) 9.982,110.01 cw(c10.589,110.01) 10.16,110.439 cw(c10.566,110.034) 10.566,110.607 11.543,110.607 cw(c11.543,110.12) 11.887,110.465 cw(c11.6,110.177) 12.006,110.177 R13.2
pads on no net: J1.12 U7.8
copper on no net: | length 22.5
  Top Layer w0.203: 0.5,2 v1(0.5,12.217)
  Bottom Layer w0.203: 0.5,2 v1(0.5,12.217) 0.5,14.275

## Polygon pours and split planes (outlines as drawn)
GND on Bottom Layer "gnd bot" (hatched 45Degree grid 0.762 track 0.241, remove dead copper, shelved, pour order 8): -11.76,21 -0.594,21 cw(c-0.606,20.394) 0,20.381 0,0 6.5,0 6.5,20.39 cw(c7.106,20.394) 7.103,21 31.48,21 31.48,30.999 -2.753,31 cw(c-2.753,40.7) -11.153,45.55 3.08,70.202 cw(c11.481,65.352) 19.881,70.202 35.316,43.467 41.816,47.209 40.5,49.487 42.665,50.737 28.666,74.986 26.501,73.736 25.501,75.468 27.666,76.718 21.846,86.799 11.481,86.8 cw(c11.481,88.9) 10.012,90.4 ccw(c-1.263,101.927) 11.807,92.484 ccw(c0.618,100.569) 12.794,94.065 ccw(c2.331,99.634) 13.197,94.898 ccw(c3.528,99.114) 13.526,95.753 ccw(c4.661,98.734) 13.773,96.625 ccw(c6.078,98.429) 13.982,98.4 13.982,100.4 13.982,111.6 8.982,111.6 8.982,100.4 8.982,99.4 cw(c5.64,99.401) 8.895,98.645 cw(c5.183,99.515) 8.655,97.94 cw(c4.018,100.047) 8.29,97.273 cw(c1.874,101.436) 7.828,96.636 cw(c-2.377,104.855) 7.299,96.019 cw(c-15.943,117.23) 6.73,95.412 6.151,94.807 ccw(c21.327,80.391) 5.59,94.192 ccw(c11.813,88.612) 4.638,92.9 -4.704,76.719 -2.539,75.468 -3.539,73.736 -5.704,74.987 -19.705,50.739 -17.54,49.489 -18.54,47.757 -20.705,49.007 -24.317,42.751 ccw(c-11.76,35.5)
3V3 on Bottom Layer "3.3V_1" (solid, remove dead copper, shelved, pour order 2): -7.595,24.206 ccw(c-7.597,23.277) -8.255,23.933 -10.347,21.841 cw(c-11.81,23.302) -11.811,21.234 -12.395,21.257 -13.497,21.35 -14.889,21.565 -15.878,21.819 -18.034,22.657 -19.633,23.571 -20.752,24.454 -21.641,25.222 -22.327,25.904 -23.368,27.127 -24.206,28.503 -24.994,30.07 -25.437,31.314 -25.883,33.063 -26.035,34.265 -26.086,35.916 -25.984,37.262 -25.781,38.456 -25.527,39.548 -25.197,40.589 -24.663,41.783 -24.003,42.951 -22.454,45.618 -21.077,47.997 -20.982,48.091 cw(c-20.398,47.507) -20.396,48.334 -20.17,48.302 -19.837,48.235 -19.558,48.108 -18.644,47.625 ccw(c-18.564,47.739) -18.54,47.602 -18.484,47.617 ccw(c-18.5,47.685) -18.44,47.649 -18.354,47.757 -17.393,49.378 ccw(c-17.564,49.476) -17.374,49.53 -17.399,49.581 ccw(c-17.482,49.547) -17.45,49.632 -18.491,50.241 -18.796,50.521 cw(c-18.133,51.262) -19.126,51.206 -19.103,51.386 -19.075,51.486 -18.796,51.971 -18.44,52.577 -6.511,73.05 -6.172,72.847 -18.484,51.587 -18.593,51.333 -18.593,51.206 -18.54,51.054 -18.484,50.956 -18.303,50.775 -18.017,50.521 -17.749,50.323 -17.551,50.14 -17.399,50.063 -17.203,49.919 -17.012,49.708 -16.935,49.555 -16.935,49.378 -17.096,49.045 -17.729,47.854 -17.958,47.523 -18.09,47.333 -18.354,47.193 -18.866,47.168 -19.94,47.141 -20.416,47.091 -20.705,47.006 -20.853,46.914 -21.077,46.611 -22.506,43.791 -23.419,42.266 -24.143,40.932 -24.74,39.497 -24.994,38.202 -25.197,36.322 -25.197,34.519 -24.943,32.537 -24.395,30.669 -23.599,28.902 -22.898,27.521 -22.073,26.448 -21.077,25.527 -19.413,24.13 -17.882,23.185 -15.824,22.454 -14.637,22.161 -13.31,21.971 -12.065,21.996 -11.281,22.25 -10.719,22.675 -10.312,23.19 -9.881,23.749 -9.398,24.333 -8.992,24.765 -8.534,25.222 -8.255,25.34 -7.239,25.349 -7.214,25.349 -7.214,24.206
3V3 on Bottom Layer "3.3V_1" (solid, remove dead copper, shelved, pour order 4): -6.625,72.847 -6.367,73.314 -6.245,73.435 cw(c-5.334,72.524) -5.334,73.812 -5.049,73.812 cw(c-5.049,72.598) -4.191,73.457 ccw(c-3.823,73.825) -3.823,73.304 -3.615,73.304 ccw(c-3.615,74.005) -3.12,73.51 -3.046,73.584 -2.057,75.26 -1.27,76.719 5.588,91.338 8.89,96.977 ccw(c8.124,97.743) 9.207,97.743 9.207,102.819 10.858,102.819 10.858,100.787 10.871,97.688 9.423,95.174 6.909,91.288 4.496,86.131 -1.7,73.205 cw(c-2.73,73.319) -2.845,72.288 -3.48,72.288 -4.369,72.517 -5.182,72.847 ccw(c-5.611,72.418) -5.611,73.025 -5.791,73.025 ccw(c-5.791,72.699) -6.022,72.93 -6.282,72.669 -6.342,72.729 ccw(c-6.626,72.445) -6.626,72.847 -6.35,73.33
no net on Bottom Layer "Bottom Layer-NetJ1_12" (solid, remove dead copper, shelved, pour order 0): 1.016,20.472 1.016,20.774 ccw(c0.149,20.774) 0.762,21.387 0.632,21.516 cw(c1.239,22.123) 0.381,22.123 0.381,23.533 -0.991,23.533 -0.998,23.525 -0.998,21.797 ccw(c-0.625,21.797) -0.889,21.533 -0.706,21.35 ccw(c-0.489,21.566) -0.489,21.26 -0.33,21.26 cw(c-0.33,20.585) 0.147,21.062 0.152,21.057 cw(c-0.093,20.811) 0.254,20.811 0.254,20.472
no net on Mechanical 4 (solid, shelved, pour order 5): -7.214,24.206
GND on Top Layer "gnd top" (hatched 45Degree grid 0.762 track 0.241, remove dead copper, shelved, pour order 7): -11.76,21 -0.594,21 cw(c-0.606,20.394) 0,20.381 0,0 6.5,0 6.5,20.39 cw(c7.106,20.394) 7.103,21 31.48,21 31.48,30.999 -2.753,31 cw(c-2.753,40.7) -11.153,45.55 3.08,70.202 cw(c11.481,65.352) 19.881,70.202 35.316,43.467 41.816,47.209 40.5,49.487 42.665,50.737 28.666,74.986 26.501,73.736 25.501,75.468 27.666,76.718 21.846,86.799 11.481,86.8 cw(c11.481,88.9) 10.012,90.4 ccw(c-1.263,101.927) 11.807,92.484 ccw(c0.618,100.569) 12.794,94.065 ccw(c2.331,99.634) 13.197,94.898 ccw(c3.528,99.114) 13.526,95.753 ccw(c4.661,98.734) 13.773,96.625 ccw(c6.078,98.429) 13.982,98.4 13.982,100.4 13.982,111.6 8.982,111.6 8.982,100.4 8.982,99.4 cw(c5.64,99.401) 8.895,98.645 cw(c5.183,99.515) 8.655,97.94 cw(c4.018,100.047) 8.29,97.273 cw(c1.874,101.436) 7.828,96.636 cw(c-2.377,104.855) 7.299,96.019 cw(c-15.943,117.23) 6.73,95.412 6.151,94.807 ccw(c21.327,80.391) 5.59,94.192 ccw(c11.813,88.612) 4.638,92.9 -4.704,76.719 -2.539,75.468 -3.539,73.736 -5.704,74.987 -19.705,50.739 -17.54,49.489 -18.54,47.757 -20.705,49.007 -24.317,42.751 ccw(c-11.76,35.5)

## Keep-outs
Keep-Out Layer:
  lines w0.064: -8.921,21.001 -8.921,22.501 -10.121,22.501 -10.121,21.001 -11.761,21.001 cw(c-11.76,35.501) -25.15,29.935 ccw(c-26.021,31.901) -26.187,34.045 cw(c-11.76,35.501) -24.318,42.751 -20.705,49.007 -18.54,47.757 -17.54,49.489 -19.705,50.739 -5.705,74.987 -3.54,73.737 -2.54,75.469 -4.705,76.719 4.638,92.9 cw(c11.813,88.612) 5.59,94.193 cw(c21.327,80.392) 6.151,94.807 6.729,95.413 ccw(c-15.944,117.23) 7.298,96.019 ccw(c-2.378,104.856) 7.827,96.637 ccw(c1.874,101.437) 8.289,97.274 ccw(c4.017,100.048) 8.654,97.94 ccw(c5.182,99.516) 8.895,98.646 ccw(c5.64,99.401) 8.981,99.4 8.981,100.4 ; -8.92,21 -0.594,21 cw(c-0.606,20.394) 0,20.381 0,0 6.5,0 6.5,20.39 cw(c7.106,20.394) 7.103,21 31.479,21 31.479,31 -2.754,31.001 cw(c-2.754,40.701) -11.154,45.551 3.08,70.203 cw(c11.48,65.353) 19.881,70.202 35.315,43.468 41.815,47.209 40.5,49.488 42.665,50.738 28.666,74.986 26.501,73.736 25.501,75.468 27.666,76.718 21.846,86.8 11.481,86.8 cw(c11.481,88.9) 10.011,90.4 ccw(c-1.264,101.928) 11.806,92.484 ccw(c0.617,100.57) 12.793,94.065 ccw(c2.33,99.635) 13.196,94.898 ccw(c3.527,99.114) 13.525,95.753 ccw(c4.66,98.734) 13.772,96.625 ccw(c6.078,98.43) 13.981,98.4 13.981,100.4 ; 8.982,100.4 8.982,111.6 ; 13.981,100.4 13.981,111.599 13.982,111.6 8.982,111.6 ; 8.982,111.6 8.982,111.6

## Other copper
Top Layer:
  pour cut-out: 0,4.506 0,0 6.551,0 6.551,4.506
Bottom Layer:
  rectangle net 3V3: 10.643,108.56 11.303,110.153
  rectangle net 3V3: -8.255,24.201 2.337,25.34
  rectangle net NetJ1_11: 1.194,13.513 1.956,22.72
  rectangle: 0.254,13.513 1.016,20.726
  rectangle net 3V3: 9.621,105.139 10.985,109.436
  rectangle net 3V3: 9.207,102.362 10.858,109.436
  pour cut-out: 0,4.506 0,0 6.525,0 6.525,4.506

## Silkscreen, mask and mechanical layers (free items; w line width, h text height)
Mechanical 1:
  drawing of 544 lines, arcs and shapes, not listed
  text "10,4" at -79.441,103.75 h3.5
  text "R2,1" at 12.875,93.875 h3.5 r16.49
  text "R9,7" at 11.106,76.167 h3.5 r295.83
  text "44,27" at 43.403,73.683 h3.5 r300
  text "10" at 13.706,63.609 h3.5 r30
  text "10" at -19.629,63.12 h3.5 r330
  text "R9,7" at -31.783,49.133 h3.5 r352.12
  text "10" at 52.914,35.72 h3.5 r90
  text "0,4" at -68.805,32.329 h3.5
  text "R14,5" at -35.824,31.665 h3.5 r19.4
Mechanical 2:
  region: -8.307,21.793 -8.307,27.701 -12.221,27.701 -12.221,21.793
  region: 5.451,20.931 5.451,26.262 1.734,26.262 1.734,20.931
  region: -12.294,31.446 -12.294,36.615 -19.67,36.615 -19.67,31.446
  rectangle: 0,0 6.5,4.521
  lines w0.127: -18.647,13.31 -13.792,13.31 -7.442,13.31 1.318,22.07 ; -14.193,30.816 -13.767,31.242 -13.767,13.31 ; -13.767,31.217 -13.31,30.759 ; -10.516,21.214 -10.19,21.54 ; -9.83,21.208 -10.162,21.54 -10.19,21.54 ; -0.711,1.905 -0.178,2.235 ; -0.711,2.565 -0.178,2.235 ; 0.734,22.07 1.318,22.07 ; 1.318,21.562 1.318,22.07 ; -10.19,21.54 -10.19,16.963 -13.792,13.36 -2.667,2.235 -0.178,2.235
  text "Stiffener Location" at -32.309,12.878 h0.76
Mechanical 3:
  circle w0.013: c13.664,82.149 r0.194
  region: -12.362,42.03 -13.362,41.816 -13.362,42.244
  region: -16.512,56.269 -17.512,56.055 -17.512,56.483
  region: -7.852,51.269 -8.852,51.055 -8.852,51.483
  region: -25.437,30.685 -26.437,30.47 -26.437,30.899
  region: 57.288,20.999 56.288,20.785 56.288,21.213
  region: 57.288,30.999 56.288,30.785 56.288,31.213
  region: 23.379,64.143 22.379,63.928 22.379,64.357
  region: 32.04,69.142 31.04,68.928 31.04,69.357
  region: 50.682,52.324 49.682,52.11 49.682,52.539
  region: 28.545,90.668 27.545,90.454 27.545,90.882
  region: 9.467,88.304 8.467,88.09 8.467,88.519
  region: 7.254,74.084 6.254,73.869 6.254,74.298
  lines w0.013: -48.402,22.598 -25.437,30.685 ; -44.171,46.431 -12.362,42.03 ; -16.512,56.269 -26.97,62.307 -12.182,53.769 -3.522,48.769 -7.852,51.269 ; 1.983,84.973 7.254,74.084 ; 8.981,99.6 13.981,99.6 ; 8.981,100.4 13.981,100.4 ; 9.467,88.304 25.527,93.057 ; 10.181,100.4 10.181,101.5 12.771,101.5 12.771,100.4 ; 10.206,100.4 10.206,101.5 ; 11.726,101.5 11.726,101.51 11.226,101.51 ; 22.712,87.3 29.844,91.418 ; 23.379,64.143 10.74,56.846 27.709,66.642 36.37,71.642 32.04,69.142 ; 28.545,90.668 39.613,71.496 50.682,52.324 ; 32.479,21 58.788,20.999 ; 32.479,31 58.788,30.999 ; 44.848,48.956 51.981,53.074 ; 57.288,20.999 57.288,15.999 57.288,25.999 57.289,41.67 57.288,30.999 ; 11.226,101.51 11.226,101.5 11.226,101.51
  lines w0.152: 13.172,107.396 13.172,107.879
  text "R2,1" at 12.874,93.875 h3.5 r16.49
  text "R9,7" at 11.106,76.168 h3.5 r295.83
  text "44,27" at 43.402,73.683 h3.5 r300
  text "10" at 13.705,63.61 h3.5 r30
  text "10" at -19.629,63.121 h3.5 r330
  text "R9,7" at -31.784,49.134 h3.5 r352.12
  text "10" at 52.914,35.72 h3.5 r90
  text "R14,5" at -35.824,31.665 h3.5 r19.4
Mechanical 4:
  lines w0.127: -8.921,21.001 -8.921,22.501 -10.121,22.501 -10.121,21.001 -11.761,21.001 cw(c-11.76,35.501) -25.15,29.935 ccw(c-26.021,31.901) -26.187,34.045 cw(c-11.76,35.501) -24.318,42.751 -20.705,49.007 -18.54,47.757 -17.54,49.489 -19.705,50.739 -5.705,74.987 -3.54,73.737 -2.54,75.469 -4.705,76.719 4.638,92.9 cw(c11.813,88.612) 5.59,94.193 cw(c21.327,80.392) 6.151,94.807 6.729,95.413 ccw(c-15.944,117.23) 7.298,96.019 ccw(c-2.378,104.856) 7.827,96.637 ccw(c1.874,101.437) 8.289,97.274 ccw(c4.017,100.048) 8.654,97.94 ccw(c5.182,99.516) 8.895,98.646 ccw(c5.64,99.401) 8.981,99.4 8.981,100.4 ; -8.92,21 -0.594,21 cw(c-0.606,20.394) 0,20.381 0,-2.54 ; 6.5,0 6.5,20.39 cw(c7.106,20.394) 7.103,21 31.479,21 31.479,31 -2.754,31.001 cw(c-2.754,40.701) -11.154,45.551 3.08,70.203 cw(c11.48,65.353) 19.881,70.202 35.315,43.468 41.815,47.209 40.5,49.488 42.665,50.738 28.666,74.986 26.501,73.736 25.501,75.468 27.666,76.718 21.846,86.8 11.481,86.8 cw(c11.481,88.9) 10.011,90.4 ccw(c-1.264,101.928) 11.806,92.484 ccw(c0.617,100.57) 12.793,94.065 ccw(c2.33,99.635) 13.196,94.898 ccw(c3.527,99.114) 13.525,95.753 ccw(c4.66,98.734) 13.772,96.625 ccw(c6.078,98.43) 13.981,98.4 13.981,100.4 ; 8.982,100.4 8.982,111.6 ; 13.981,100.4 13.981,111.599 13.982,111.6 8.982,111.6 ; 8.982,111.6 8.982,111.6
Mechanical 12:
  circle w0.013: c-6.77,59.951 r2.5
  circle w0.013: c30.23,59.95 r2.5
  circle w0.013: c24.229,27.95 r2.5
  circle w0.013: c15.729,27.95 r2.5
  circle w0.013: c7.229,27.95 r2.5
  circle w0.013: c-1.271,27.951 r2.5
  circle w0.013: c-6.77,59.951 r1.5
  circle w0.013: c30.23,59.95 r1.5
  circle w0.013: c24.229,27.95 r1.5
  circle w0.013: c15.729,27.95 r1.5
  circle w0.013: c7.229,27.95 r1.5
  circle w0.013: c-1.271,27.951 r1.5
  circle w0.013: c-6.769,59.95 r2.5
  circle w0.013: c30.231,59.949 r2.5
  circle w0.013: c-6.769,59.95 r1.5
  circle w0.013: c30.231,59.949 r1.5
  circle w0.013: c24.23,27.949 r2.5
  circle w0.013: c15.73,27.95 r2.5
  circle w0.013: c7.23,27.95 r2.5
  circle w0.013: c-1.27,27.95 r2.5
  circle w0.013: c24.23,27.949 r1.5
  circle w0.013: c15.73,27.95 r1.5
  circle w0.013: c7.23,27.95 r1.5
  circle w0.013: c-1.27,27.95 r1.5
  circle w0.013: c24.23,27.949 r2.5
  circle w0.013: c15.73,27.95 r2.5
  circle w0.013: c7.23,27.95 r2.5
  circle w0.013: c-1.27,27.95 r2.5
  circle w0.013: c24.23,27.949 r1.5
  circle w0.013: c15.73,27.95 r1.5
  circle w0.013: c7.23,27.95 r1.5
  circle w0.013: c-1.27,27.95 r1.5
  lines w0.013: -66.192,20.288 -65.692,20.288 ; -66.192,25.288 -65.692,25.288 -65.692,20.289 ; -66.192,52.288 -65.692,52.288 ; -66.192,57.288 -65.692,57.288 -65.692,52.289 ; 159.614,71.227 cw(c159.894,69.754) 159.894,71.254 ; 160.612,68.437 ccw(c159.894,69.754) 160.769,68.535 ; 161.32,70.22 cw(c159.894,69.754) 161.388,69.622 ; 164.834,38.814 cw(c165.895,37.754) 164.953,38.922 ; 164.834,36.693 ccw(c165.895,37.754) 164.954,36.586 ; 166.836,36.586 ccw(c165.895,37.754) 166.956,36.693 ; 166.836,38.922 cw(c165.895,37.754) 166.955,38.814 ; 173.334,36.693 ccw(c174.395,37.754) 173.454,36.586 ; 173.334,38.815 cw(c174.395,37.754) 173.453,38.922 ; 175.336,36.586 ccw(c174.395,37.754) 175.456,36.693 ; 175.336,38.922 cw(c174.395,37.754) 175.455,38.815 ; 179.527,61.271 cw(c179.806,59.797) 179.806,61.297 ; 180.524,58.48 ccw(c179.806,59.797) 180.681,58.578 ; 181.232,60.263 cw(c179.806,59.797) 181.3,59.665 ; 181.834,36.694 ccw(c182.895,37.754) 181.954,36.586 ; 181.834,38.815 cw(c182.895,37.754) 181.953,38.922 ; 183.836,36.586 ccw(c182.895,37.754) 183.956,36.694 ; 183.836,38.922 cw(c182.895,37.754) 183.955,38.815 ; 184.746,26.736 ccw(c185.807,27.797) 184.866,26.629 ; 184.746,28.858 cw(c185.807,27.797) 184.866,28.965 ; 186.748,26.629 ccw(c185.807,27.797) 186.868,26.736 ; 186.748,28.965 cw(c185.807,27.797) 186.868,28.858 ; 190.334,36.694 ccw(c191.395,37.754) 190.454,36.587 ; 190.334,38.815 cw(c191.395,37.754) 190.453,38.922 ; 192.336,36.587 ccw(c191.395,37.754) 192.456,36.694 ; 192.336,38.922 cw(c191.395,37.754) 192.455,38.815 ; 193.246,26.737 ccw(c194.307,27.797) 193.366,26.629 ; 193.246,28.858 cw(c194.307,27.797) 193.366,28.965 ; 195.248,26.629 ccw(c194.307,27.797) 195.368,26.737 ; 195.248,28.965 cw(c194.307,27.797) 195.368,28.858 ; 198.209,70.476 cw(c196.894,69.755) 198.292,70.298 ; 201.746,26.737 ccw(c202.807,27.797) 201.866,26.63 ; 201.746,28.858 cw(c202.807,27.797) 201.866,28.965 ; 203.748,26.63 ccw(c202.807,27.797) 203.868,26.737 ; 203.748,28.965 cw(c202.807,27.797) 203.868,28.858 ; 210.246,26.737 ccw(c211.307,27.798) 210.366,26.63 ; 210.246,28.858 cw(c211.307,27.798) 210.366,28.965 ; 212.248,28.965 cw(c211.307,27.798) 212.368,28.858 ; 212.248,26.63 ccw(c211.307,27.798) 212.368,26.737 ; 218.122,60.519 cw(c216.806,59.798) 218.204,60.342
Drill Drawing:
  text "PWB, LED SENSE FLEX" at 191.858,-92.579 h4
  text "PWB-020218-001" at 196.608,-100.854 h3.25
  text "1" at 258.208,-102.354 h2
  text "1" at 253.408,-102.454 h2
Mechanical 17:
  text "NOTES: /  / 1. ALL ASSEMBLY MATERIALS TO BE RoHS COMPLIANT. /  / 2. MATERIAL: /           • FLEXIBLE METAL CLAD DIELECTRIC IAW                 /             IPC-4204/11 E1E2 O0/0 CU W7 T/T /           • STIFFENER IAW IPC-4203/1-E1E8M1 /  / 3. FINISH:  IMMERSION GOLD /  / ALL EXPOSED CONDUCTIVE PATTERN AREAS NOT COVERED WITH COVERLAY MATERIAL OR OTHER PLATING  / SHALL BE IMMERSION GOLD (0.000030-0.000090 mm) OVER ELECTROLESS NICKEL (0.001-0.006 mm). /  / 4. LEGEND SHALL BE WHITE, PERMANENT, ORGANIC, NON-CONDUCTIVE UV OR EPOXY TYPE INK APPLIED  / TO THE TOP SIDE OF THE BOARD. THERE SHALL BE NO LEGEND ON ANY SOLDERABLE COMPONENT LAND. /  / 5. ALL ASSEMBLY MATERIALS TO BE RoHS COMPLIANT. /  / 6. ANY LABELS OR COMPOSITION OF, APPLIED TO THE BOARD NEED TO BE APPROVIED BY AIRZAI /  / 7. MINIMUM TRACE WIDTHS: /           EXTERNAL: 0.203 mm  INTERNAL: N/A /  / 8. MINIMUM SPACE BETWEEN FEATURES: /          EXTERNAL: 0.15 mm  INTERNAL: N/A /  / 9. Overall Board Thickness: 0.1mm" at 87.427,25.679 h2
  text "PWA, LED SENSE FLEX" at 192.941,-94.474 h4
  text "PWA-020218-001" at 197.868,-101.865 h3.25
  text "1" at 253.208,-102.154 h1.5
  text "1" at 258.008,-102.154 h1.5
Mechanical 18:
  lines w0.127: -104.72,-48.914 -99.64,-48.914 ; -104.72,11.411 -99.64,11.411 ; -104.72,71.736 -99.64,71.736 ; -41.22,-109.239 -41.22,-104.159 ; -41.22,126.981 -41.22,132.061 ; 22.28,-109.239 22.28,-104.159 ; 22.28,126.981 22.28,132.061 ; 85.78,-109.239 85.78,-104.159 ; 85.78,126.981 85.78,132.061 ; 149.28,-109.239 149.28,-104.159 ; 149.28,126.981 149.28,132.061 ; 156.879,-96.595 271.179,-96.595 ; 156.879,-90.455 184.074,-90.455 ; 156.879,-84.51 184.074,-84.51 ; 156.879,-79.155 184.074,-79.155 ; 156.9,-104.159 271.2,-104.159 ; 172.774,-104.24 172.774,-73.76 ; 184.074,-104.215 184.074,-73.735 ; 184.074,-87.275 271.176,-87.275 ; 192.709,-73.735 271.179,-73.735 ; 194.979,-73.735 156.879,-73.735 ; 212.78,-109.239 212.78,-104.159 ; 212.78,126.981 212.78,132.061 ; 261.619,-104.215 261.619,-96.595 ; 271.2,-73.679 271.2,-104.159 ; 271.2,-48.914 276.28,-48.914 ; 271.2,11.411 276.28,11.411 ; 271.2,71.736 276.28,71.736 ; 121.319,-104.215 156.879,-104.215 ; 121.319,-104.215 156.879,-104.215 ; 121.319,-104.215 121.319,-73.735 156.879,-73.735 ; 156.879,-104.215 271.179,-104.215 ; 156.879,-104.215 271.179,-104.215 ; 156.879,-104.215 156.879,-73.735 ; 271.179,-104.215 271.179,-73.735 ; 271.179,-104.215 271.179,-73.735 ; 271.2,-104.159 271.2,126.981 -99.64,126.981 -99.64,-104.159 271.2,-104.159 ; -104.72,-109.239 -104.72,132.061 276.28,132.061 276.28,-109.239 -104.72,-109.239
  text "1" at -73.444,128.759 h1.78
  text "2" at -10.055,128.759 h1.78
  text "3" at 53.175,128.759 h1.78
  text "4" at 116.844,128.759 h1.78
  text "5" at 180.318,128.759 h1.78
  text "6" at 243.945,128.759 h1.78
  text "A" at -102.815,99.727 h1.78
  text "A" at 273.105,99.727 h1.78
  text "B" at -102.815,39.275 h1.78
  text "B" at 273.105,39.275 h1.78
  text "C" at -102.815,-21.05 h1.78
  text "C" at 273.105,-21.05 h1.78
  text "AIRZAI PROPRIETARY & CONFIDENTIAL" at 160.84,-70.919 h3.25
  text "DATE:" at 173.549,-75.315 h1.14
  text "ENGINEER:" at 157.449,-75.475 h1.14
  text "UNLESS OTHERWISE SPECIFIED" at 123.849,-77.015 h1.5
  text "05/13/19" at 173.736,-78.074 h1.5
  text "FD" at 162.348,-78.233 h2
  text "DIMENSIONS ARE IN MM" at 126.949,-80.215 h1.5
  text "PCB DESIGNER:" at 157.349,-80.768 h1.14
  text "DATE:" at 173.249,-80.815 h1.14
  text "D" at -102.815,-81.248 h1.78
  text "D" at 273.105,-81.248 h1.78
  text "AIRZAI" at 191.465,-82.219 h3.25
  text "TOLERANCES" at 132.049,-83.415 h1.5
  text "05/13/19" at 173.736,-83.524 h1.5
  text "DFM" at 161.678,-83.564 h2
  text "DATE:" at 173.249,-86.215 h1.14
  text "CHECK" at 157.349,-86.268 h1.14
  text "ANGULAR" at 144.349,-87.415 h1.5
  text "DECIMALS" at 123.949,-87.715 h1.5
  text "TITLE:" at 185.39,-88.894 h1.14
  text "FD" at 163.348,-89.233 h2
  text ".XX +/- .127MM" at 122.749,-91.715 h1.5
  text "+/-" at 144.049,-91.815 h1.5
  text "REL" at 157.649,-92.135 h1.14
  text "DATE:" at 173.649,-92.315 h1.14
  text "FD" at 163.098,-94.733 h2
  text ".XXX +/- .080MM" at 122.449,-95.815 h1.5
  text "REV:" at 262.189,-98.215 h1.14
  text "SCALE:" at 173.789,-98.235 h1.14
  text "DWG NO:" at 185.249,-98.435 h1.14
  text "SIZE" at 157.649,-98.515 h1.14
  text "B" at 162.824,-101.832 h3.05
  text "DO NOT SCALE DRAWING" at 123.849,-101.915 h1.8
  text "B" at 264.315,-102.319 h3.05
  text "1:1" at 175.024,-102.432 h3.05
  text "SHEET" at 247.849,-103.235 h1.14
  text "OF" at 254.549,-103.235 h1.14
  text "1" at -73.444,-107.461 h1.78
  text "2" at -10.055,-107.461 h1.78
  text "3" at 53.175,-107.461 h1.78
  text "4" at 116.844,-107.461 h1.78
  text "5" at 180.318,-107.461 h1.78
  text "6" at 243.945,-107.461 h1.78